# Altium PCB triumvi_integrated_small.PcbDoc
Units mil, origin at the board's own origin, x right, y up, seen from the top; angles counter-clockwise.
Board outline 2450 x 750 mil, 2 copper layers (Top Layer, Bottom Layer); 155 components, 126 nets, 572 pads, 20 vias.
Unrouted connection lines stored in the file: 393.
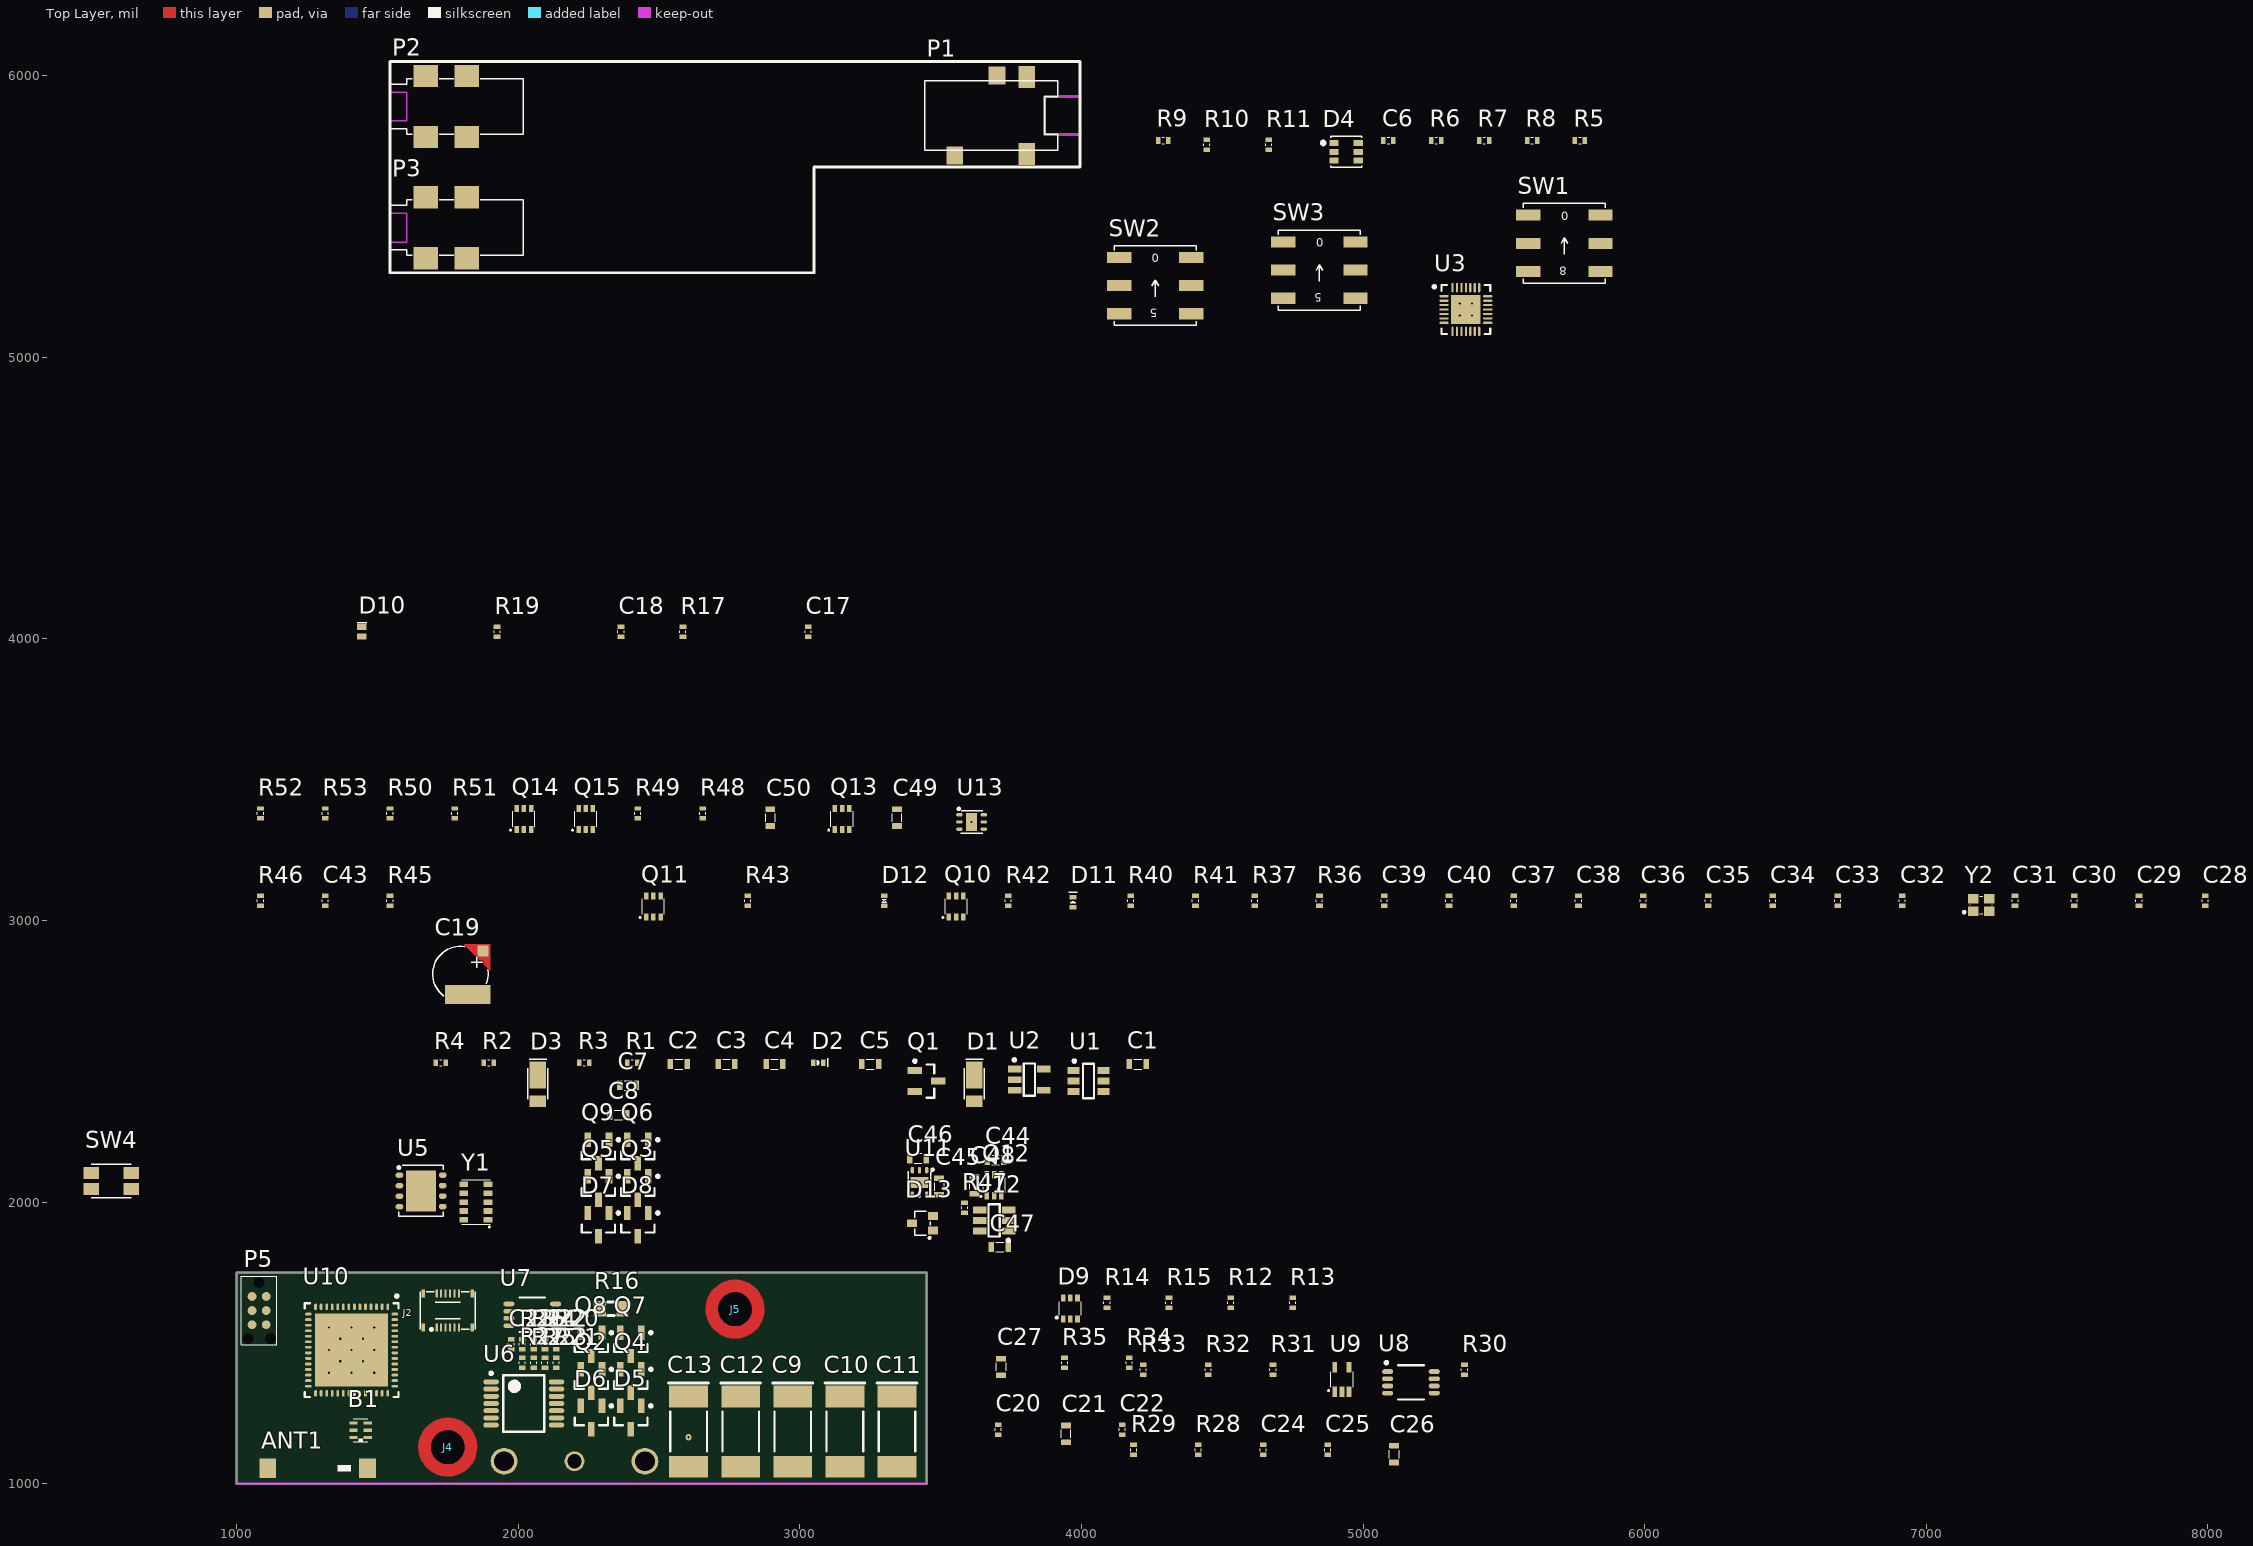
[diagram p0: Top Layer view]
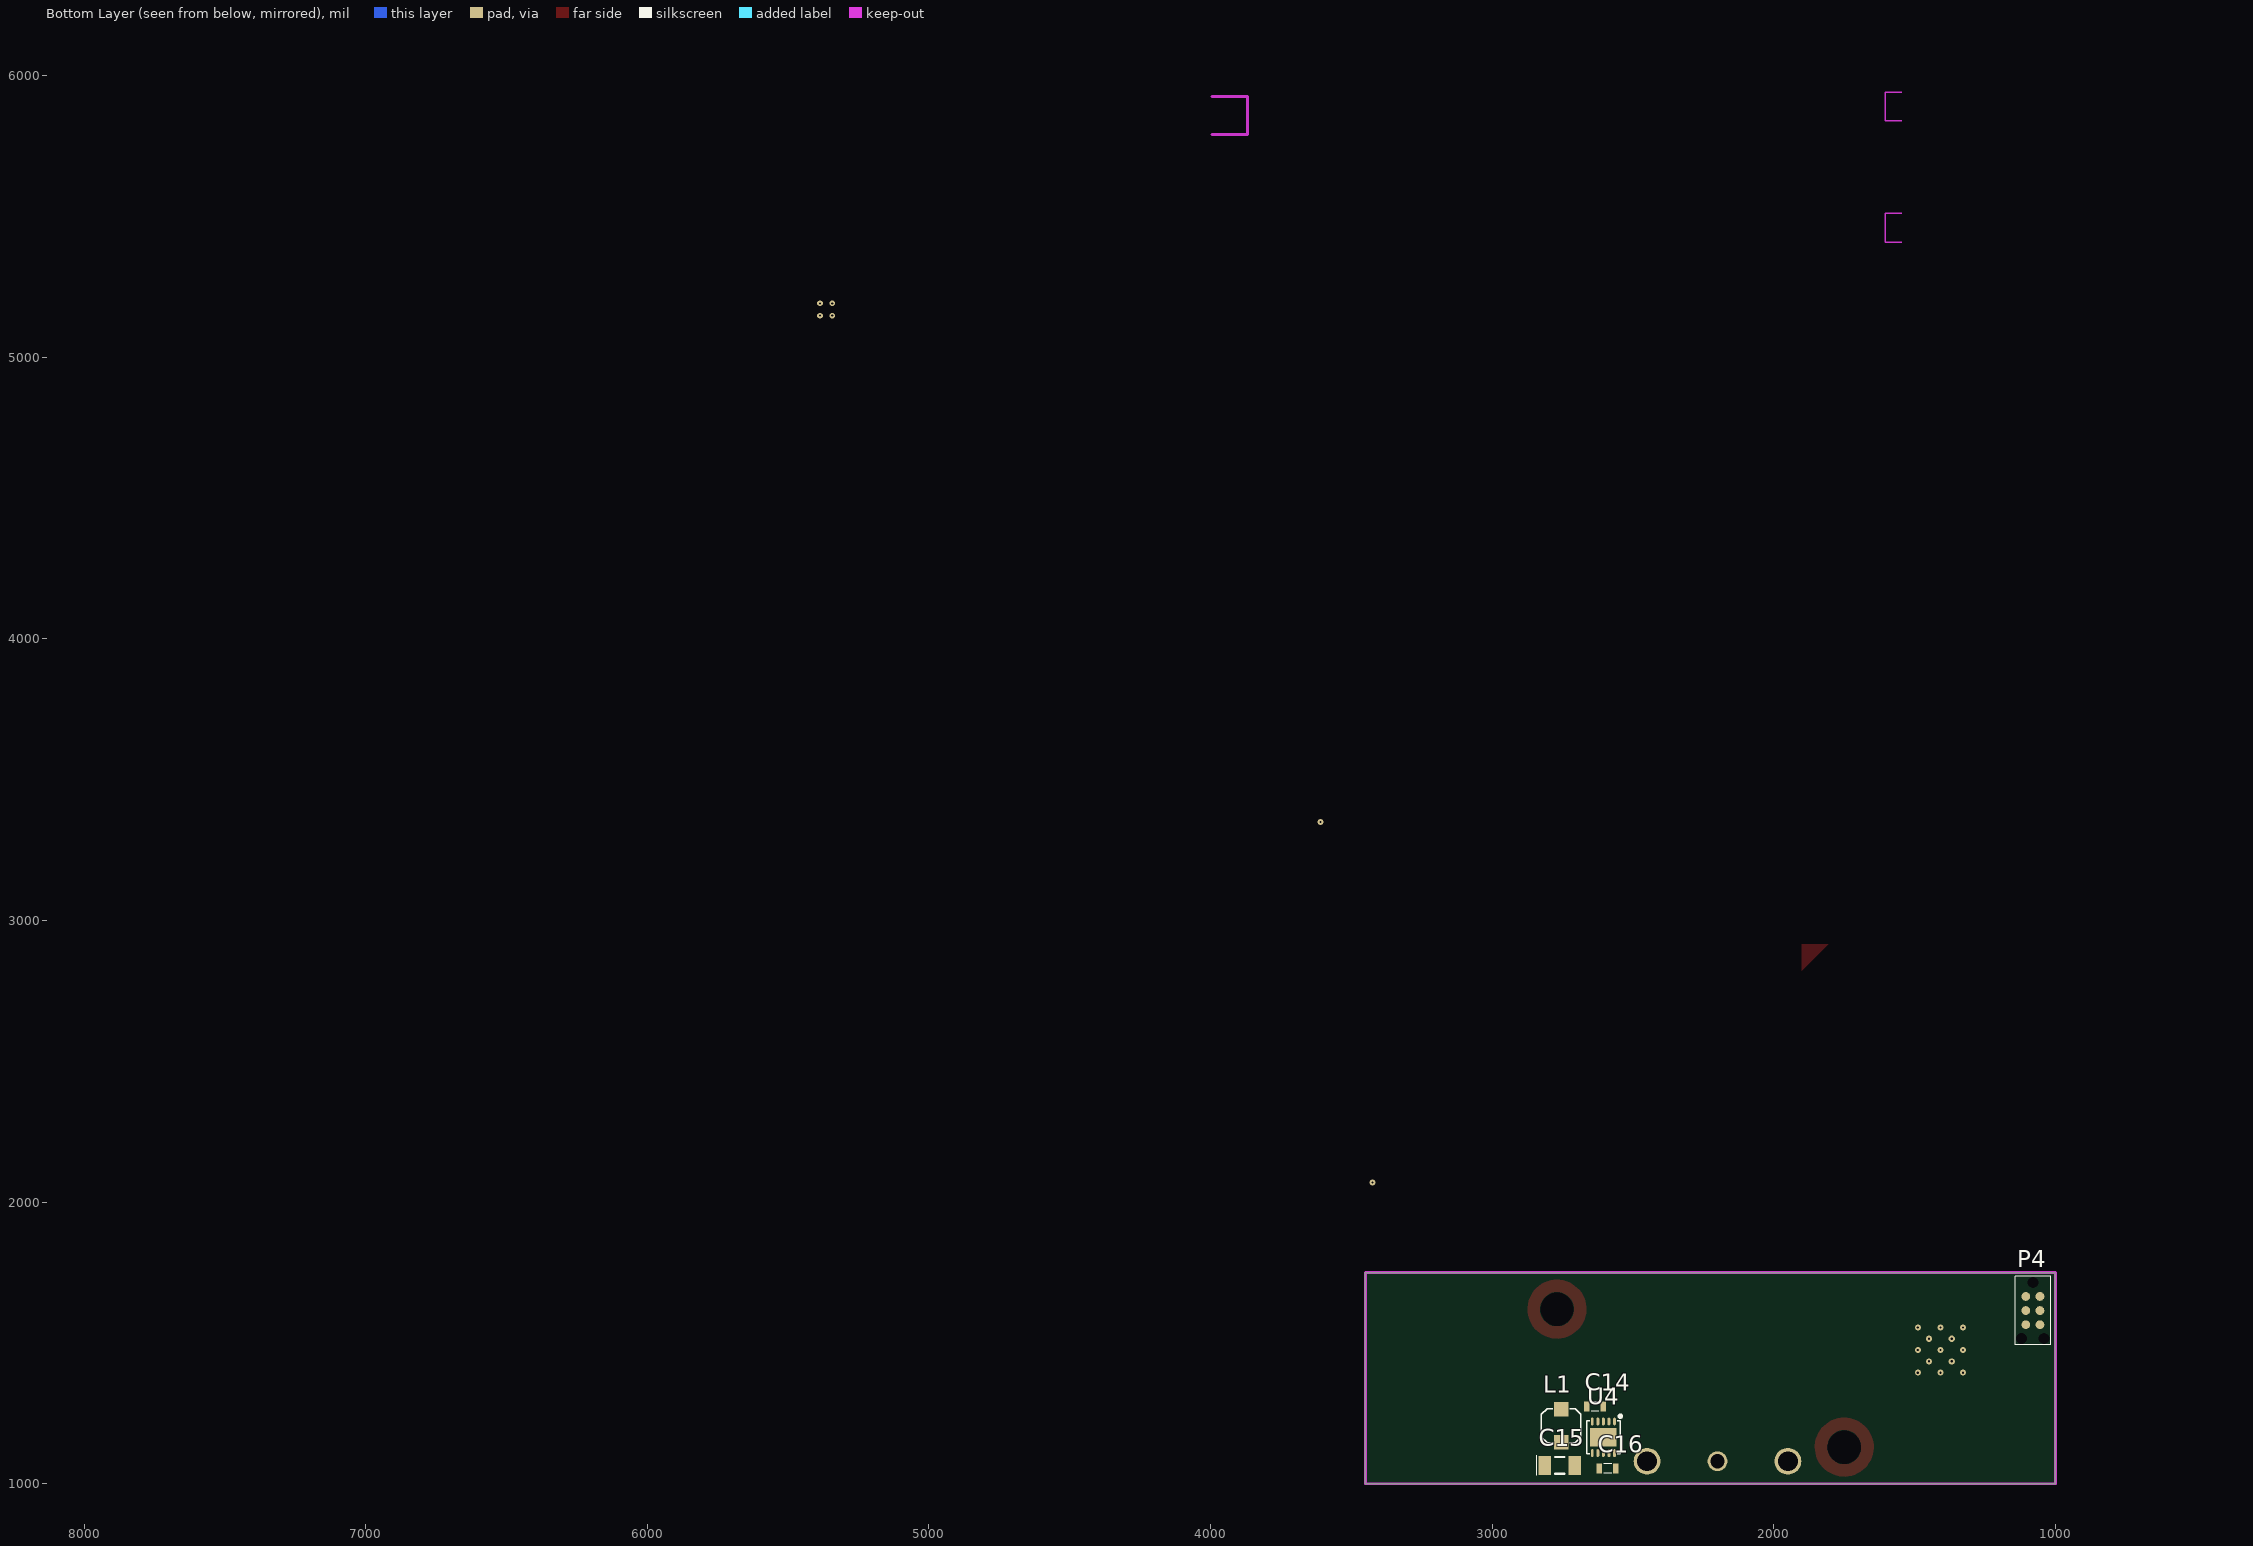
[diagram p1: Bottom Layer view, seen from below]

## Layer stack, top to bottom
Top Solder: solder mask 0.4, Solder Resist, Dk 3.5
Top Layer: signal copper 1.4
Dielectric 1: dielectric 12.6, FR-4, Dk 4.8
Bottom Layer: signal copper 1.4
Bottom Solder: solder mask 0.4, Solder Resist, Dk 3.5

## Board outline
1000,1000 3450,1000 3450,1750 1000,1750

## Design rules (kind name [scope] priority, off if disabled: settings)
Clearance "non plated holes" [InPadClass('NPHOLES')] p1: gap=10 // Sunstone Circuits Minimum Clearance Rule (MLB~4&6 Layer Designs)
Clearance "Clearance~Sunstone Circuits" [All] p2: gap=6 except(8: Poly-Poly) // Sunstone Circuits Minimum Clearance Rule (MLB~4&6 Layer Designs)
DiffPairsRouting [All] p1: maxlimit=10 minlimit=10 mostfreqgap=10 toplayer_minwidth=6 toplayer_maxwidth=15 toplayer_prefwidth=15 bottomlayer_minwidth=6 bottomlayer_maxwidth=15 bottomlayer_prefwidth=15 maxuncoupledlength=500
HoleSize "HoleSize~Sunstone Circuits" [All] p1: absolutevalues=TRUE maxlimit=251 minlimit=8 maxpercent=80.000 minpercent=20.000 // Sunstone Circuits Hole Size Rule (MLB~4&6 Layer Designs)
HoleSize Testpoint [All] p2: absolutevalues=TRUE maxlimit=100 minlimit=1 maxpercent=80.000 minpercent=20.000
HoleSize TestPointUsage [All] p3: absolutevalues=TRUE maxlimit=100 minlimit=1 maxpercent=80.000 minpercent=20.000
MinimumAnnularRing "MinimumAnnularRing~Sunstone Circuits" [All] p1 off: minimumring=7 // Sunstone Circuits Minimum Annular Ring (MLB~4&6 Layer Designs)
MinimumSolderMaskSliver [All] p1 off: minsoldermaskwidth=10
PlaneClearance "PlaneClearance~Sunstone Circuits" [All] p1: clearance=12 // Sunstone Circuits Power Plane Clearance Rule (MLB~4&6 Layer Designs)
PlaneConnect "PlaneConnect~Sunstone Circuits" [All] p1: planeconnectstyle=Relief reliefexpansion=10 reliefentries=4 reliefconductorwidth=8 reliefairgap=10 // Sunstone Circuits Power Plane Connect Rule (MLB~4&6 Layer Designs)
PolygonConnect "PolygonConnect~Sunstone Circuits" [All] p1: connectstyle=Relief reliefconductorwidth=8 reliefentries=4 polygonreliefangle="90 Angle" airgapwidth=10 // Sunstone Circuits Polygon Connect Style (MLB~4&6 Layer Designs)
RoomDefinition U_programming_header [InComponentClass('U_programming_header')] p1 off: confinementstyle=ConfineIn formatcopy=TRUE lockcomponents=FALSE outline 0,0 2000,0 2000,1000 0,1000
RoomDefinition U_power_generation [InComponentClass('U_power_generation')] p2 off: confinementstyle=ConfineIn formatcopy=TRUE lockcomponents=FALSE outline 0,0 2000,0 2000,1000 0,1000
RoomDefinition U_fram_rtc [InComponentClass('U_fram_rtc')] p3 off: confinementstyle=ConfineIn formatcopy=TRUE lockcomponents=FALSE outline 0,0 2000,0 2000,1000 0,1000
RoomDefinition U_energy_harvesting [InComponentClass('U_energy_harvesting')] p4 off: confinementstyle=ConfineIn formatcopy=TRUE lockcomponents=FALSE outline 0,0 2000,0 2000,1000 0,1000
RoomDefinition U_CT_switch [InComponentClass('U_CT_switch')] p5 off: confinementstyle=ConfineIn formatcopy=TRUE lockcomponents=FALSE outline 0,0 2000,0 2000,1000 0,1000
RoomDefinition U_config [InComponentClass('U_config')] p6 off: confinementstyle=ConfineIn formatcopy=TRUE lockcomponents=FALSE outline 0,0 2000,0 2000,1000 0,1000
RoomDefinition U_charging [InComponentClass('U_charging')] p7 off: confinementstyle=ConfineIn formatcopy=TRUE lockcomponents=FALSE outline 0,0 2000,0 2000,1000 0,1000
RoutingVias "RoutingVias~Sunstone Circuits" [All] p1: holewidth=16 width=30 viastyle="Through Hole" minholewidth=6 minwidth=20 maxholewidth=20 maxwidth=40 // Sunstone Circuits Routing Vias Rule (MLB~4&6 Layer Designs)
ShortCircuit "ShortCircuit~Sunstone Circuits" [All] p1: allowed=FALSE // Sunstone Circuits Short Circuit Rule~Do Not Allow (MLB~4&6 Layer Designs)
SilkToSilkClearance [All] p1 off: silktosilkclearance=10
SilkToSolderMaskClearance [IsPad] p1 off: minsilkscreentomaskgap=10 clearancetoexposedcopper=TRUE
SolderMaskExpansion TentVias [isVia] p1: expansion=-20 // Sunstone Circuits Solder Mask Expansion Rule (MLB~4&6 Layer Designs)
SolderMaskExpansion "SolderMaskExpansion~Sunstone Circuits" [All] p2: expansion=3 // Sunstone Circuits Solder Mask Expansion Rule (MLB~4&6 Layer Designs)
ViasUnderSMD "ViasUnderSMD~Sunstone Circuits" [All] p1: allowed=FALSE // Sunstone Circuits Vias Under SMD~Do Not Allow (MLB~4&6 Layer Designs)
Width "Width~Sunstone Circuits" [All] p1: maxlimit=100 minlimit=6 preferedwidth=10 // Sunstone Circuits Minimum Width Rule (MLB~4&6 Layer Designs)
22 further rules are at their usual default settings.

## Classes and differential pairs
component class U_charging: C1 C2 C3 C4 C5 D1 D2 D3 Q1 R1 R2 R3 R4 U1 U2
component class U_config: C6 D4 P1 P2 P3 R5 R6 R7 R8 R9 R10 R11 SW1 SW2 SW3 U3
component class U_CT_switch: C7 C8 D5 D6 D7 D8 D9 Q2 Q3 Q4 Q5 Q6 Q7 Q8 Q9 R12 R13 R14 R15 R16
component class U_energy_harvesting: C9 C10 C11 C12 C13 C14 C15 C16 L1 U4
component class U_fram_rtc: C17 C18 C19 D10 R17 R19 U5 Y1
component class U_IV_sensing: C20 C21 C22 C23 C24 C25 C26 C27 R20 R21 R22 R23 R24 R25 R26 R27 R28 R29 R30 R31 R32 R33 R34 R35 U6 U7 U8 U9
component class U_mcu: ANT1 B1 C28 C29 C30 C31 C32 C33 C34 C35 C36 C37 C38 C39 C40 C43 D11 D12 Q10 Q11 R36 R37 R40 R41 R42 R43 R45 R46 SW4 U10 Y2
component class U_power_generation: C44 C45 C46 C47 C48 C49 C50 D13 Q12 Q13 Q14 Q15 R47 R48 R49 R50 R51 R52 R53 U11 U12 U13
component class U_programming_header: P4 P5
differential pair CC2538_RF: +CC2538_RF_P -CC2538_RF_N

## Components (designator, comment, footprint, x,y, rotation, side; value= is the part's Value field where it differs from the comment)
ANT1 "2450AT45A100" 2450AT45A100 1287.83,1055 r180 top
B1 "2450BM15A0002E" 2450BM15A0002 1440.59,1190 r180 top
C1 "1u" 0603 4200,2490 r0 top
C2 "1u" 0603 2570,2490 r0 top
C3 "1u" 0603 2740,2490 r0 top
C4 "4.7u" 0603 2910,2490 r0 top
C5 "4.7u" 0603 3250,2490 r0 top
C6 "0.1u" 0402 5090,5769.37 r0 top
C7 "0.068u" 0603 2390,2415 r0 top
C8 "10000p" 0603 2355,2310 r0 top
C9 "220u" 2917 2975,1185 r270 top
C10 "220u" 2917 3160,1185 r270 top
C11 "220u" 2917 3345,1185 r270 top
C12 "220u" 2917 2790,1185 r270 top
C13 "220u" 2917 2605,1185 r270 top
C14 "1u" 0603 2635,1275 r180 bottom
C15 "100u" "1206 - POLAR MARKING" 2760,1065 r180 bottom
C16 "4.7u" 0603 2590,1055 r180 bottom
C17 "0.1u" 0402 3030,4025 r90 top
C18 "0.1u" 0402 2365,4025 r90 top
C19 "80m" XH414HG-IV01E 1795,2810 r0 top
C20 "0.1u" 0402 3705,1192.28 r90 top
C21 "10u" 0603 3945,1177.28 r90 top
C22 "0.1u" 0402 4145,1192.28 r90 top
C23 "18p" 0402 1975,1495 r270 top
C24 "0.1u" 0402 4645,1120 r90 top
C25 "0.1u" 0402 4875,1120 r90 top
C26 "10u" 0603 5110,1105 r90 top
C27 "10u" 0603 3715,1415 r90 top
C28 "0.1u" 0402 7990,3070 r90 top
C29 "0.1u" 0402 7755,3070 r90 top
C30 "0.1u" 0402 7525,3070 r90 top
C31 "0.1u" 0402 7315,3070 r90 top
C32 "0.1u" 0402 6915,3070 r90 top
C33 "0.1u" 0402 6685,3070 r90 top
C34 "0.1u" 0402 6455,3070 r90 top
C35 "220p" 0402 6225,3070 r90 top
C36 "0.1u" 0402 5995,3070 r90 top
C37 "12p" 0402 5535,3070 r90 top
C38 "12p" 0402 5765,3070 r90 top
C39 "0.1u" 0402 5075,3070 r90 top
C40 "0.1u" 0402 5305,3070 r90 top
C43 "1000p" 0402 1315,3070 r90 top
C44 "4.7u" 0603 3695,2150 r0 top
C45 "4.7u" 0603 3495,2055 r90 top
C46 "4.7u" 0603 3420,2155 r180 top
C47 "4.7u" 0603 3710,1840 r180 top
C48 "10u" 0603 3620,2060 r90 top
C49 "4.7u" 0603 3345,3365 r90 top
C50 "4.7u" 0603 2895,3365 r90 top
D1 "DFLS130L" PowerDI123 3620,2420 r90 top
D2 "APG1005CGC-T" "0402 - LED" 3065,2495 r0 top
D3 "DFLS130L" PowerDI123 2070,2420 r90 top
D4 "CLY6D-FKC" PLCC6 4940,5729.37 r0 top
D5 "D_BAS40-04" SOT23-3 2400,1235 r270 top
D6 "D_BAS40-04" SOT23-3 2260,1235 r270 top
D7 "D_BAS40-04" SOT23-3 2285,1920 r270 top
D8 "D_BAS40-04" SOT23-3 2425,1920 r270 top
D9 "BAS40TW" SOT-363 3960.59,1622.4 r0 top
D10 "CZRER52C3V6" 0503/SOD-723F 1445,4025 r90 top
D11 "LED, Red" "0402 - LED" 3970,3065 r90 top
D12 "CDBQR0130L" "0402 - DIODE" 3300,3070 r90 top
D13 "BAV70W-7-F" SOT323 3435,1925 r90 top
J2 "DF40B(2.0)-12DS-0.4V" DF40B(2.0)-12DS-0.4V 1750,1615 r0 top
J4 "9774020243R" 9774020243R 1750,1130 r0 top
J5 "9774020243R" 9774020243R 2770,1620 r0 top (schematic designator J4)
L1 "10u" CDRH2D18 2755,1205.94 r90 bottom
P1 "PJ3516S-041" PJ3516S-041 3916.54,5858.27 r180 top
P2 "PJ2505S-041" PJ2505S-041 1605,5890 r0 top
P3 "PJ2505S-041" PJ2505S-041 1605,5460 r0 top
P4 "TC2030" TC2030-IDC-NLFP 1080,1615 r270 bottom
P5 "TC2030" TC2030-IDC-NLFP 1080,1615 r270 top
Q1 "Si2369DS" SOT23-3 3450,2430 r0 top
Q2 "Si2367DS" SOT23-3 2260,1365 r270 top
Q3 "Si2342DS" SOT23-3 2425,2050 r270 top
Q4 "Si2367DS" SOT23-3 2400,1365 r270 top
Q5 "Si2342DS" SOT23-3 2285,2050 r270 top
Q6 "Si2338DS" SOT23-3 2425,2180 r270 top
Q7 "Si2338DS" SOT23-3 2400,1495 r270 top
Q8 "Si2338DS" SOT23-3 2260,1495 r270 top
Q9 "Si2338DS" SOT23-3 2285,2180 r270 top
Q10 "DMN2004DWK" SC70-6 3555,3050 r0 top
Q11 "DMN2004DWK" SC70-6 2480,3050 r0 top
Q12 "Si1965DH" SC70-6 3690,2060 r0 top
Q13 "Si1865DDL" SC70-6 3150,3360 r0 top
Q14 "Si1865DDL" SC70-6 2020,3360 r0 top
Q15 "Si1865DDL" SC70-6 2240,3360 r0 top
R1 "910" 0402 2405,2495 r0 top
R2 "47k" 0402 1895,2495 r0 top
R3 "47k" 0402 2235,2495 r0 top
R4 "1Meg" 0402 1725,2495 r0 top
R5 "100k" 0402 5770,5769.37 r0 top
R6 "110" 0402 5260,5769.37 r0 top
R7 "220" 0402 5430,5769.37 r0 top
R8 "324" 0402 5600,5769.37 r0 top
R9 "10k" 0402 4290,5769.37 r0 top
R10 "10k" 0402 4445,5754.37 r90 top
R11 "100k" 0402 4665,5754.37 r90 top
R12 "47k" 0402 4530.59,1642.4 r90 top
R13 "47k" 0402 4750.59,1642.4 r90 top
R14 "1Meg" 0402 4090.59,1642.4 r90 top
R15 "1Meg" 0402 4310.59,1642.4 r90 top
R16 "20" 0805 2330,1621.34 r180 top
R17 "10k" 0402 2585,4025 r90 top
R19 "10k" 0402 1925,4025 r90 top
R20 "910" 0402 2135,1495 r270 top
R21 "48.7k" 0402 2135,1430 r270 top
R22 "324" 0402 2095,1495 r270 top
R23 "24.3k" 0402 2095,1430 r270 top
R24 "20" 0402 2055,1495 r270 top
R25 "12.1k" 0402 2055,1430 r270 top
R26 "110" 0402 2015,1495 r270 top
R27 "5.76k" 0402 2015,1430 r270 top
R28 "100k" 0402 4415,1120 r90 top
R29 "2Meg" 0402 4185,1120 r90 top
R30 "1Meg" 0402 5360,1405 r90 top
R31 "100k" 0402 4680,1405 r90 top
R32 "1Meg" 0402 4450,1405 r90 top
R33 "100k" 0402 4220,1405 r90 top
R34 "47k" 0402 4170,1430 r90 top
R35 "100" 0402 3940,1430 r90 top
R36 "47k" 0402 4845,3070 r90 top
R37 "1Meg" 0402 4615,3070 r90 top
R40 "1Meg" 0402 4175,3070 r90 top
R41 "2.2k" 0402 4405,3070 r90 top
R42 "1Meg" 0402 3740,3070 r90 top
R43 "1Meg" 0402 2815,3070 r90 top
R45 "2.2k" 0402 1545,3070 r90 top
R46 "56k" 0402 1085,3070 r90 top
R47 "470k" 0402 3585,1980 r270 top
R48 "1Meg" 0402 2655,3380 r90 top
R49 "1Meg" 0402 2425,3380 r90 top
R50 "1Meg" 0402 1545,3380 r90 top
R51 "1Meg" 0402 1775,3380 r90 top
R52 "1Meg" 0402 1085,3380 r90 top
R53 "1Meg" 0402 1315,3380 r90 top
SW1 "SH-7050TA" SH-7050A 5715,5404.37 r0 top
SW2 "SH-7010TA" SH-7010A 4262.05,5254.37 r0 top
SW3 "SH-7010TA" SH-7010A 4845,5309.37 r0 top
SW4 "EVQP7C" EVQP7C 555,2075 r180 top
U1 "LTC3200-5" SOT23-6 4025,2430 r0 top
U2 "MCP73831" TSOT23-5 3815,2435 r0 top
U3 "SX1509B" QFN40P400X400X60_HS-29N 5365,5169.37 r0 top
U4 "LTC3588EDD-1#PBF" QFN-10 2605,1165 r270 bottom
U5 "FM25V02A-DGTR" TDFN-8 1655,2040 r0 top
U6 "ADG604" TSSOP-14 2020,1285 r0 top
U7 "INA333" MSOP-8 2050,1600 r180 top
U8 "MCP6032" MSOP-8 5170,1360 r0 top
U9 "TS881" SC70-5 4925,1370 r0 top
U10 "CC2538" QFN56 1408.54,1474.53 r270 top
U11 "ADP151_LFCSP" CP-6-3 3425,2070 r270 top
U12 "LTC4412" TSOT-23 3690,1935 r180 top
U13 "ADP151_LFCSP" CP-6-3 3610,3350 r0 top
Y1 "RV-3049-C3" RV-3049-C3 1850,2000 r90 top
Y2 "FA-128" FA-128 7195,3055 r0 top

## Footprints (in the part's own frame and the unit in brackets; to place one, negate y for a bottom-side part, rotate by r counter-clockwise, add the part's x,y. Pads: shape width x height; smd on the part's side, far side on the other; paste and mask are expansions set on the pad)
0402 [mm] "2-Leads, Body 1.00x0.50mm, IPC Medium Density"
  rect 0.4x0.6 smd: 1(-0.45,0) 2(0.45,0)
  silkscreen extent -0.1,-0.28 0.1,0.28, body extent -0.53,-0.28 0.53,0.27, height 0.4
"0402 - DIODE" [mm] "2-Leads, Body 1.00x0.50mm, IPC Medium Density"
  rect 0.4x0.6 smd: 1(-0.45,0) 2(0.45,0)
  silkscreen extent -0.13,-0.18 0.13,0.18, body extent -0.53,-0.28 0.53,0.27, height 0.4
"0402 - LED" [mm] "2-Leads, Body 1.00x0.50mm, IPC Medium Density"
  rect 0.4x0.6 smd: 1(-0.45,0) 2(0.45,0)
  silkscreen extent -0.13,-0.38 0.89,0.38, body extent -0.53,-0.28 0.53,0.27, height 0.4
0503/SOD-723F [mm]
  rect 0.55x0.85 smd: 1(-0.425,0) 2(0.425,0)
  silkscreen extent 0.8,-0.43 0.8,0.43, body extent -0.58,-0.33 0.58,0.33, height 0.6
0603 [mm] "2-Leads, Body 1.55x0.85mm, IPC Medium Density"
  rect 0.5x0.9 smd: 1(-0.75,0) 2(0.75,0)
  silkscreen extent -0.35,-0.45 0.35,0.43, body extent -0.75,-0.42 0.75,0.43, height 0.5
0805 [mm] "Chip Resistor, Body 2.0x1.2mm, IPC Low Density"
  rect 1.1x1.4 smd: 1(-1.025,0) 2(1.025,0)
  silkscreen extent -0.3,-0.6 0.3,0.6, body extent -1.1,-0.67 1.1,0.67, height 0.7
"1206 - POLAR MARKING" [mm]
  rect 1.1x1.7 smd: 1(-1.35,0) 2(1.35,0)
  silkscreen extent -2.07,-0.9 0.4,0.91, body extent -1.58,-0.83 1.58,0.82, height 1.59
2450AT45A100 [mm] "Johnson Technology 2.4 GHz chip antenna"
  rect 1.5x1.8 smd: 1(-4.5,0) ""(4.5,0)
  silkscreen extent -3,-0.3 -1.8,0.3, body extent -4.8,-1 4.8,1, height 1.2
2450BM15A0002 [mm] "Chip Array, Flat, 6-Leads, Pitch 0.65mm,  Body 2.00x1.25mm,  IPC Medium Density"
  rect 0.75x0.3 smd: 1(-0.65,0.65) 2(-0.65,0) 3(-0.65,-0.65) 4(0.65,-0.65) 5(0.65,0) 6(0.65,0.65)
  silkscreen extent -0.65,-1.05 0.65,1.05, body extent -0.67,-1.05 0.67,1.05, height 0.81
2917 [mm] "Chip Capacitor, 2-Leads, Body 7.30x3.20mm, IPC Medium Density"
  rect 1.95x3.5 smd: 1(-3.175,0) 2(3.175,0)
  silkscreen extent -4.4,-1.8 1.8,1.8, body extent -3.65,-2.15 3.65,2.15, height 4.31
9774020243R [mm] "m2 standoff, 2mm stack height"
  round 0 hole 3 unplated: ""(0,0)
  Top Layer region: 2.65,0 2.302,-1.312 1.35,-2.28 0.044,-2.65 -1.274,-2.324 -2.257,-1.388 -2.649,-0.088 -2.345,1.235 -1.426,2.234 -0.132,2.647 1.196,2.365 2.21,1.462 2.644,0.176 2.644,0.176 2.625,0.175 1.55,0.175 1.54,0.177 1.254,0.911 0.644,1.41 -0.133,1.544 -0.875,1.279 -1.391,0.684 -1.547,-0.089 -1.304,-0.838 -0.723,-1.371 0.044,-1.549 0.8,-1.327 1.35,-0.762 1.55,0 1.55,0
  Top Layer region: 1.55,0 2.65,0 2.649,0.088 2.644,0.176 2.644,0.176 2.625,0.175 1.55,0.175 1.54,0.177 1.547,0.088 1.55,0
  body extent -2.17,-2.17 2.18,2.17, height 2
CDRH2D18 [mm] "Sumdia SMD power inductor"
  rect 1.3x1.3 smd: 1(-1.5,0) 2(1.5,0)
  silkscreen extent -1.52,-1.78 1.52,1.78, body extent -1.5,-1.7 1.5,1.8, height 2
CP-6-3 [mm] "QFN, 6-Leads, Body 2.00x2.00mm, Pitch 0.65mm, Thermal Pad 1.00x1.55mm, IPC Medium Density"
  oval 0.6x0.3 smd: 1(-1.1,0.65) 2(-1.1,0) 3(-1.1,-0.65) 4(1.1,-0.65) 5(1.1,0) 6(1.1,0.65)
  rect 1x1.6 smd: 7(0,0)
  silkscreen extent -1.25,-1 1,1.27, body extent -1,-1 1,1, height 0.6
DF40B(2.0)-12DS-0.4V [mm] "Hirose DF40 Series, 0.4 mm pitch, 2.0 mm stack height, 12 positions"
  rect 0.2x0.7 smd: 1(-1,-1.54) 2(-0.6,-1.54) 3(-0.2,-1.54) 4(0.2,-1.54) 5(0.6,-1.54) 6(1,-1.54) 7(1,1.54) 8(0.6,1.54) 9(0.2,1.54) 10(-0.2,1.54) 11(-0.6,1.54) 12(-1,1.54)
  rect 0.3x0.7 smd: ""(-2.2,-1.54) ""(-2.2,1.54) ""(2.2,-1.54) ""(2.2,1.54)
  silkscreen extent -2.5,-1.8 2.5,1.7, body extent -2.5,-1.69 2.5,1.69, height 1.9
EVQP7C [mm] "Panasonic EVQP7 tactile button"
  rect 1.4x1.05 smd: 1(-1.8,0.725) 1(1.8,0.725) 2(-1.8,-0.725) 2(1.8,-0.725)
  round 0 hole 0.7 unplated: ""(0,0.9) ""(0,-0.9)
  silkscreen extent -1.8,-1.5 1.8,1.5, body extent -1.8,-2.2 1.8,1.5, height 1.35
FA-128 [mm] "Seiko Epson FA-128 Crystal"
  rect 0.95x0.85 smd: 1(-0.725,-0.575) 2(0.725,-0.575) 3(0.725,0.575) 4(-0.725,0.575)
  silkscreen extent -1.63,-0.8 1,0.8, body extent -1,-0.8 1,0.8, height 0.5
MSOP-8 [mm] "TSOP, 8-Leads, Body 3.00x3.00mm, Pitch 0.65mm, Thermal Pad 1.80x1.50mm, IPC Medium Density"
  oval 1x0.42 smd: 1(-2.1,0.975) 2(-2.1,0.325) 3(-2.1,-0.325) 4(-2.1,-0.975) 5(2.1,-0.975) 6(2.1,-0.325) 7(2.1,0.325) 8(2.1,0.975)
  silkscreen extent -2.35,-1.55 1.15,1.9, body extent -1.55,-1.55 1.55,1.55, height 1.1
PJ2505S-041 [mm] "2.5 mm phone jack, 4 terminals"
  rect 2.2x2 smd: 1(1.7,2.75) 2(1.7,-2.75) 3(5.4,2.75) 4(5.4,-2.75)
  round 0 hole 1.5 unplated: ""(2.8,0) ""(7.8,0)
  Keep-Out Layer lines w0.127: -1.524,-1.3 0,-1.3 0,1.3 -1.524,1.3
  silkscreen extent -1.5,-2.5 10.5,2.5, body extent -1.5,-3.1 10.5,2.9, height 3.7
PJ3516S-041 [mm] "Switchtech Enterprise LTD. 3.5mm phone jack"
  rect 1.5x2 smd: 1(2.8,-3.465) 2(2.8,3.465)
  rect 1.5x1.6 smd: 3(5.5,-3.6) 4(9.3,3.6)
  rect 0x0 hole 1.3 unplated: ""(10.55,0)
  Keep-Out Layer lines w0.254: -2,1.7 1.2,1.7 1.2,-1.7 -2,-1.7
  silkscreen extent 0,-3.15 12,3.15, body extent -2,-3.15 12,3.15, height 4.5
PLCC6 [mm] "CREE PLCC6 LED"
  rect 0.85x0.55 smd: 1(-1.1,0.8) 2(-1.1,0) 3(-1.1,-0.8) 4(1.1,-0.8) 5(1.1,0) 6(1.1,0.8)
  silkscreen extent -2.22,-1.4 1.4,1.4, body extent -1.7,-1.4 1.7,1.4, height 1.85
PowerDI123 [mm] "Diodes PowerDI123 pacakge"
  rect 1.05x1.5 smd: 1(-1.575,0)
  rect 2.4x1.5 smd: 2(0.8,0)
  silkscreen extent -1.4,-0.9 2.22,0.9, body extent -1.85,-0.9 1.85,0.9, height 1
QFN40P400X400X60_HS-29N [mm] "QFN, 28-Leads, Body 4.00x4.00mm, Pitch 0.40mm, Thermal Pad 2.65x2.65mm, IPC Medium Density"
  oval 0.85x0.2 smd: 1(-1.975,1.2) 2(-1.975,0.8) 3(-1.975,0.4) 4(-1.975,0) 5(-1.975,-0.4) 6(-1.975,-0.8) 7(-1.975,-1.2) 15(1.975,-1.2) 16(1.975,-0.8) 17(1.975,-0.4) 18(1.975,0) 19(1.975,0.4) 20(1.975,0.8) 21(1.975,1.2)
  oval 0.2x0.85 smd: 8(-1.2,-1.975) 9(-0.8,-1.975) 10(-0.4,-1.975) 11(0,-1.975) 12(0.4,-1.975) 13(0.8,-1.975) 14(1.2,-1.975) 22(1.2,1.975) 23(0.8,1.975) 24(0.4,1.975) 25(0,1.975) 26(-0.4,1.975) 27(-0.8,1.975) 28(-1.2,1.975)
  rect 2.65x2.65 smd: 29(0,0)
  silkscreen extent -2.97,-2.2 2.2,2.2, body extent -2.05,-2.05 2.05,2.05, height 0.6
QFN56 [mm] "QFN, 56-Leads, Body 8.00x8.00mm, Pitch 0.50mm, Thermal Pad 6.60x6.60mm, IPC Medium Density"
  oval 0.6x0.25 smd: 1(-3.9,3.25) 2(-3.9,2.75) 3(-3.9,2.25) 4(-3.9,1.75) 5(-3.9,1.25) 6(-3.9,0.75) 7(-3.9,0.25) 8(-3.9,-0.25) 9(-3.9,-0.75) 10(-3.9,-1.25) 11(-3.9,-1.75) 12(-3.9,-2.25) 13(-3.9,-2.75) 14(-3.9,-3.25) 29(3.9,-3.25) 30(3.9,-2.75) 31(3.9,-2.25) 32(3.9,-1.75) 33(3.9,-1.25) 34(3.9,-0.75) 35(3.9,-0.25) 36(3.9,0.25) 37(3.9,0.75) 38(3.9,1.25) 39(3.9,1.75) 40(3.9,2.25) 41(3.9,2.75) 42(3.9,3.25)
  oval 0.25x0.6 smd: 15(-3.25,-3.9) 16(-2.75,-3.9) 17(-2.25,-3.9) 18(-1.75,-3.9) 19(-1.25,-3.9) 20(-0.75,-3.9) 21(-0.25,-3.9) 22(0.25,-3.9) 23(0.75,-3.9) 24(1.25,-3.9) 25(1.75,-3.9) 26(2.25,-3.9) 27(2.75,-3.9) 28(3.25,-3.9) 43(3.25,3.9) 44(2.75,3.9) 45(2.25,3.9) 46(1.75,3.9) 47(1.25,3.9) 48(0.75,3.9) 49(0.25,3.9) 50(-0.25,3.9) 51(-0.75,3.9) 52(-1.25,3.9) 53(-1.75,3.9) 54(-2.25,3.9) 55(-2.75,3.9) 56(-3.25,3.9)
  rect 6.6x6.6 smd: 57(0,0)
  silkscreen extent -5,-4.22 4.22,4.23, body extent -4.08,-4.07 4.07,4.08, height 1
QFN-10 [mm] "QFN, 10-Leads, Body 4.00x4.00mm, Pitch 0.50mm, Thermal Pad 1.65x2.38mm, IPC Medium Density"
  oval 0.7x0.25 smd: 1(-1.425,1) 2(-1.425,0.5) 3(-1.425,0) 4(-1.425,-0.5) 5(-1.425,-1) 6(1.425,-1) 7(1.425,-0.5) 8(1.425,0) 9(1.425,0.5) 10(1.425,1)
  rect 1.65x2.38 smd: 11(0,0)
  silkscreen extent -2.02,-1.5 1.5,1.65, body extent -1.5,-1.5 1.5,1.5, height 0.75
RV-3049-C3 [mm] "RV-3049-C3"
  rect 0.5x0.8 smd: 1(-1.6,-1.1) 2(-0.8,-1.1) 3(0,-1.1) 4(0.8,-1.1) 5(1.6,-1.1) 6(1.6,1.1) 7(0.8,1.1) 8(0,1.1) 9(-0.8,1.1) 10(-1.6,1.1)
  silkscreen extent -2.26,-1.3 2,1.3, body extent -1.9,-1.3 1.9,1.3, height 0.9
SC70-5 [mm]
  rect 0.45x0.95 smd: 1(-0.65,-1.1) 2(0,-1.1) 3(0.65,-1.1) 4(0.65,1.1) 5(-0.65,1.1)
  silkscreen extent -1.2,-1 1,0.7, body extent -1,-0.7 1,0.7, height 1.1
SC70-6 [mm]
  rect 0.406x0.648 smd: 1(-0.65,-0.95) 2(0,-0.95) 3(0.65,-0.95) 4(0.65,0.95) 5(0,0.95) 6(-0.65,0.95)
  silkscreen extent -1.2,-1 1,0.7, body extent -1,-0.7 1,0.7, height 1.1
SH-7010A [mm] "Rotary Coded Switch, SH-7000 series, 10 positions, real code, J hook"
  rect 2.2x1 smd: 1(-3.25,2.54) 2(3.25,-2.54) 4(-3.25,-2.54) 8(3.25,2.54) C(-3.25,0) C(3.25,0)
  silkscreen extent -3.7,-3.6 3.7,3.6, body extent -3.75,-3.65 3.75,3.65, height 3.77
SH-7050A [mm] "Rotary Coded Switch, SH-7000 series, 16 positions, real code, J hook"
  rect 2.2x1 smd: 1(-3.25,2.54) 2(3.25,-2.54) 4(-3.25,-2.54) 8(3.25,2.54) C(-3.25,0) C(3.25,0)
  silkscreen extent -3.7,-3.6 3.7,3.6, body extent -3.75,-3.65 3.75,3.65, height 3.77
SOT23-3 [mm] "SOT23, 3-Leads, Body 2.9x1.3mm, Pitch 0.95mm, Lead Span 2.3mm, IPC Medium Density"
  rect 1.3x0.6 smd: 1(-1.05,0.95) 2(-1.05,-0.95) 3(1.05,0)
  silkscreen extent -1.17,-1.5 0.7,1.93, body extent -0.7,-1.5 0.7,1.5, height 1.2
SOT23-6 [mm] "SOT23, 6-Leads, Body 2.90x2.45mm, Pitch 0.95mm, IPC Medium Density"
  rect 1.05x0.6 smd: 1(-1.35,0.95) 2(-1.35,0) 3(-1.35,-0.95) 4(1.35,-0.95) 5(1.35,0) 6(1.35,0.95)
  silkscreen extent -1.4,-1.55 0.5,1.92, body extent -0.88,-1.52 0.87,1.53, height 1.45
SOT323 [mm] "SOT323"
  rect 0.7x0.9 smd: 1(-0.65,-0.95) 2(0.65,-0.95) 3(0,0.95)
  silkscreen extent -1.38,-0.71 1.1,0.7, body extent -1.1,-0.7 1.1,0.7, height 1
SOT-363 [mm]
  rect 0.42x0.6 smd: 1(-0.65,-0.95) 2(0,-0.95) 3(0.65,-0.95) 4(0.65,0.95) 5(0,0.95) 6(-0.65,0.95)
  silkscreen extent -1.28,-0.88 1,0.6, body extent -1,-0.6 1,0.6, height 1
TC2030-IDC-NLFP [mil]
  round 31 smd paste-1181.1: 1(-50,-25) 2(-50,25) 3(0,-25) 4(0,25) 5(50,-25) 6(50,25)
  round 0 hole 39 unplated: ""(-100,0) ""(100,-40) ""(100,40)
  Top Layer pour cut-out: -50,25 -50,-25 50,-25 50,25
  silkscreen extent -122,-63 122,63
TDFN-8 [mm] "CYPRESS TDFN-8 (4 x 4.5 x 0.8 mm)"
  oval 0.7x0.5 smd: 1(-1.95,1.425) 2(-1.95,0.475) 3(-1.95,-0.475) 4(-1.95,-1.425) 5(1.95,-1.425) 6(1.95,-0.475) 7(1.95,0.475) 8(1.95,1.425)
  rect 2.7x3.7 smd: 9(0,0)
  silkscreen extent -2.1,-2.3 2,2.3, body extent -2,-2.3 2,2.3, height 0.8
TSOT23-5 [mm] "SOT23, 5-Leads, Body 2.90x2.80mm, Pitch 0.95mm, IPC Medium Density"
  rect 1.22x0.6 smd: 1(-1.31,0.95) 2(-1.31,0) 3(-1.31,-0.95) 4(1.31,-0.95) 5(1.31,0.95)
  silkscreen extent -1.47,-1.45 0.5,1.9, body extent -0.87,-1.45 0.87,1.45, height 1
TSOT-23 [mm] "SOT23, 6-Leads, Body 2.90x2.45mm, Pitch 0.95mm, IPC Medium Density"
  rect 1.22x0.62 smd: 1(-1.31,0.95) 2(-1.31,0) 3(-1.31,-0.95) 4(1.31,-0.95) 5(1.31,0) 6(1.31,0.95)
  silkscreen extent -1.4,-1.45 0.5,1.92, body extent -0.88,-1.45 0.87,1.45, height 1
TSSOP-14 [mm] "TSOP, 14-Leads, Body 5.00x4.40mm, Pitch 0.65mm, IPC Medium Density"
  oval 1.4x0.45 smd: 1(-2.95,1.95) 2(-2.95,1.3) 3(-2.95,0.65) 4(-2.95,0) 5(-2.95,-0.65) 6(-2.95,-1.3) 7(-2.95,-1.95) 8(2.95,-1.95) 9(2.95,-1.3) 10(2.95,-0.65) 11(2.95,0) 12(2.95,0.65) 13(2.95,1.3) 14(2.95,1.95)
  silkscreen extent -3.07,-2.55 1.85,2.85, body extent -3.19,-2.55 3.19,2.55, height 1.1
XH414HG-IV01E [mm] "Seiko instruments XH414HG-IV01E"
  rect 1x1 smd: 1(2.05,2.075)
  rect 4.1x1.7 smd: 2(0.65,-1.85)
  Top Layer region: 2.7,0.3 2.7,2.7 0.3,2.7
  silkscreen extent -2.5,-2.01 2.5,2.5, body extent -2.4,-2.4 2.4,2.4, height 1.85

## Part data
ANT1: "2.45 GHz High Gain SMD Chip Antenna"
B1: "2.45 GHz Balun for TI CC253X"
C1 C2 C3 C14: library part C1608X7R1C105K080AC, "1μF ±10% 16V Ceramic Capacitor X7R 0603"
C4 C5 C16 C44 C45 C46 C47 C49 C50: library part CGB3B1X5R1A475K055AC, "4.7μF ±10% 10V Ceramic Capacitor X5R 0603"
C6 C17 C18 C20 C22 C24 C25 C28 C29 C30 C31 C32 C33 C34 C36 C39 C40: library part GRM155R71C104KA88D, "0.10μF ±10% 16V Ceramic Capacitor X7R 0402"
C7: library part C0603C683K5RACTU, "0.068μF ±10% 50V Ceramic Capacitor X7R 0603"
C8: library part C0603C103J5RACTU, "10000pF ∮5% 50V Ceramic Capacitor X7R 0603"
C9 C10 C11 C12 C13: library part T495X227K016ATE100, "220μF ±10% Molded Tantalum Capacitors 16V"
C15: library part F930J107MAA, "100μF ±20% Molded Tantalum Capacitors 6.3V 1206"
C19: library part XH414HG-IV01E, "80mF (EDLC) Supercapacitor 3.3V Coin"
C21 C26 C27 C48: library part C1608X5R0J106M080AB, "10μF ±20% 6.3V Ceramic Capacitor X5R 0603"
C23: library part 500R07S180GV4T, "18pF ∮2% 50V Ceramic Capacitor C0G, NP0 0402"
C35: library part C0402C221K5RACTU, "220pF ∮10% 50V Ceramic Capacitor X7R 0402"
C37 C38: library part 500R07S120GV4T, "12pF ∮2% 50V Ceramic Capacitor C0G, NP0 0402"
C43: library part C1005C0G1H102J050BA, "1000pF ∮5% 50V Ceramic Capacitor C0G, NP0 0402"
D1 D3: "1.0A SURFACE MOUNT SCHOTTKY BARRIER RECTIFIER"
D2: "Green 571nm LED Indication - Discrete 2V 0402 (1005 Metric)"
D4: library part CLY6D-FKC-CK1N1D1BB7D3D3, "Red, Green, Blue (RGB) 622nm Red, 530nm Green, 470nm Blue LED Indication - Discrete 2.1V Red, 3V Green, 3V Blue 6-SMD, J-Lead"
D5 D6 D7 D8: "SURFACE MOUNT SCHOTTKY BARRIER DIODE"
D9: library part D_BAS40TW, "SURFACE MOUNT SCHOTTKY BARRIER DIODE ARRAYS"
D10: "Zener Diode 3.6V 150mW ∮5% Surface Mount 0503 (1308 Metric)"
D11: library part SML-P12UTT86, "Red 620nm LED Indication - Discrete 2V 2-SMD"
D12: "Diode Schottky 30V 100mA Surface Mount 0402/SOD-923F"
D13: "Diode Array 1 Pair Common Cathode Standard 75V 150mA Surface Mount SC-70, SOT-323"
J2: "Hirose BM20 Series, 0.4mm pitch, 2mm stack height, 12 pos, header"
J4 J5: "2 mm stack height, m2 standoff"
L1: library part CDRH2D18/LDNP-100NC, "10μH Shielded Inductor 1A 180 mOhm Max Nonstandard"
P1: "3.5 mm phone jack, 4 terminals"
P2 P3: "2.5 mm phone jack, 4 terminals"
P4 P5: "TC2030-MCP-NL"
Q1: "P-Channel 30-V (D-S) MOSFET"
Q2 Q4: "P-Channel 20 V (D-S) MOSFET"
Q3 Q5: "N-Channel 8 V (D-S) MOSFET"
Q6 Q7 Q8 Q9: "N-Channel 30 V (D-S) MOSFET"
Q10 Q11: "DUAL N-CHANNEL ENHANCEMENT MODE MOSFET"
Q12: "Dual P-Channel 12 V (D-S) MOSFET"
Q13 Q14 Q15: "Load Switch with Level-Shift"
R1 R20: library part CRCW0402910RFKED, "RES SMD 910 OHM 1% 1/16W 0402"
R2 R3 R12 R13 R34 R36: library part CRCW040247K0FKED, "RES SMD 47K OHM 1% 1/16W 0402"
R4 R14 R15 R30 R32 R37 R40 R42 R43 R48 R49 R50 R51 R52 R53: library part CRCW04021M00FKED, "RES SMD 1M OHM 1% 1/16W 0402"
R5 R11 R28 R31 R33: library part CRCW0402100KFKED, "RES SMD 100K OHM 1% 1/16W 0402"
R6 R26: library part CRCW0402110RFKED, "RES SMD 110 OHM 1% 1/16W 0402"
R7: library part CRCW0402220RFKED, "RES SMD 220 OHM 1% 1/16W 0402"
R8 R22: library part CRCW0402324RFKED, "RES SMD 324 OHM 1% 1/16W 0402"
R9 R10 R17 R19: library part CRCW040210K0FKED, "RES SMD 10K OHM 1% 1/16W 0402"
R16: library part RTAN0805BKE20R0, "RES SMD 20 OHM 0.1% 1/5W 0805"
R21: library part RT0402DRD0748K7L, "RES SMD 48.7K OHM 0.5% 1/16W 0402"
R23: library part RC0402FR-0724K3L, "RES SMD 24.3K OHM 0.5% 1/16W 0402"
R24: library part CRCW040220R0FKED, "RES SMD 20 OHM 1% 1/16W 0402"
R25: library part CRCW040212K1FKED, "RES SMD 12.1K OHM 1% 1/16W 0402"
R27: library part RC0402FR-075K76L, "RES SMD 5.76K OHM 0.5% 1/16W 0402"
R29: library part CRCW04022M00FKED, "RES SMD 2M OHM 1% 1/16W 0402"
R35: library part CRCW0402100RFKED, "RES SMD 100 OHM 1% 1/16W 0402"
R41 R45: library part CRCW04022K20FKED, "RES SMD 2.2K OHM 1% 1/16W 0402"
R46: library part CRCW040256K0FKED, "RES SMD 56K OHM 1% 1/16W 0402"
R47: library part CRCW0402470KJNED, "RES SMD 470K OHM 5% 1/16W 0402"
SW1 SW2 SW3: "ROTARY CODED SWITCHES"
SW4: "3.5 mm⊙2.9 mm Side-operational SMD  Light Touch Switches"
U1: library part LTC3200ES6-5#TRMPBF, "Low Noise, Regulated   Charge Pump DC/DC Converters"
U2: "Miniature Single-Cell, Fully Integrated Li-Ion,  Li-Polymer Charge Management Controllers"
U3: "Voltage Level Shifting GPIO  with LED Driver and Keypad Engine"
U4: "Piezoelectric Energy Harvesting Power Supply"
U5: "256-Kbit (32 K ⊙ 8) Serial (SPI) F-RAM"
U6: "1 pC Charge Injection, 100 pA Leakage  CMOS  5 V/5 V/3 V 4-Channel Multiplexer"
U7: "Micro-Power (50uA), Zero-Drift, Rail-to-Rail Out  Instrumentation Amplifier"
U8: "0.9 μA, High Precision Op Amps"
U9: "Rail-to-rail 0.9 V nanopower comparator"
U10: "A Powerful System-On-Chip for 2.4-GHz IEEE 802.15.4, 6LoWPAN  and ZigBee Applications"
U11 U13: "Ultralow Noise, 200 mA,  CMOS Linear Regulator"
U12: "Low Loss PowerPath Controller in ThinSOT"
Y1: "Real Time Clock Module with SPI-Bus"
Y2: "MHz Range Crystal Unit"

## Free pads (board coordinates)
  round 95 hole 70: ""(1950,1080) ""(2450,1080)
  round 70 hole 50: ""(2200,1080)

## Via types
v1: diameter 22, hole 8, Top Layer to Bottom Layer, 14 vias
v2: diameter 19.68, hole 8, Top Layer to Bottom Layer, 4 vias
v3: diameter 21.65, hole 8, Top Layer to Bottom Layer, 2 vias

## Nets (pads, with @x,y where several pads share a name; then routed paths per layer and width w, separated by ;. In a path a pad name is that pad's centre, name@x,y a point inside that pad or via, vN(x,y) a via of type N, cw(c..) or ccw(c..) an arc to the next point about the centre after c; other vN are vias at no path point)
BATTERYPACKDETECT: R5.2 U10.52
BATTERYPACKPOWER: C6.1 Q13.2 Q13.3 R5.1 R6.1 R7.1 R8.1 R9.1 R10.1 R11.1 U3.4 U3.12 U3.18
BLD_CTRL: P5.5 U10.18
BLD_RX: P5.4 U10.16
BLD_TX: P5.3 U10.17
CC2538_RF_N: B1.3 U10.38
CC2538_RF_P: B1.4 U10.37
CT1: D6.3 D8.3 pad.@1950,1080 U4.2
CT2: D5.3 D7.3 pad.@2450,1080 U4.1
CURRENT_WAVEFORM: U7.6 U10.19
CURRENTMEASUREEN: Q6.1 Q7.1 Q8.1 Q9.1 Q14.5 R52.1 U10.13
EXT_VOLT_SEL: P1.2 U10.49
EXT_VOLT_WAVE: P1.3 U10.21
G1: Q12.5 U12.5
G2: Q12.2 R47.2 U12.4
GND: B1.2 B1.5 B1.6 C2.1 C3.1 C4.2 C5.2 C6.2 C9.2 C10.2 C11.2 C12.2 C13.2 C15.2 C16.2 C17.2 C18.2 C19.2 C20.2 C21.2 C22.2 C23.2 C24.2 C25.2 C26.2 C27.2 C28.2 C29.2 C30.2 C31.2 C32.2 C33.2 C34.2 C35.2 C36.2 C37.2 C38.2 C39.2 C40.2 C43.2 C44.2 C45.2 C46.2 C47.2 C48.2 C49.2 C50.2 D10.1 P1.1 P2.1 P3.1 P4.5 P5.2 Q6.2 Q7.2 Q8.2 Q9.2 Q10.1 Q10.4 Q11.1 Q13.1 Q14.1 Q15.1 R2.2 R3.2 R4.2 R32.2 R33.2 R43.2 R46.2 R49.2 R52.2 R53.2 SW1.C SW2.C SW3.C SW4.2 U1.2 U2.2 U3.3 U3.10 U3.17 U3.26 U3.29 U4.9 U4.11 U5.4 U6.3 U6.13 U7.4 U8.4 U9.2 U10.1 U10.57 U11.3 U11.7 U12.2 U12.3 U13.3 U13.7 Y1.6 Y2.2 Y2.4
  other v1: 2605,1165 1328.54,1394.53 1408.54,1394.53 1488.54,1394.53 1368.54,1434.53 1448.54,1434.53 1328.54,1474.53 1408.54,1474.53 1488.54,1474.53 1368.54,1514.53 1448.54,1514.53 1328.54,1554.53 1408.54,1554.53 1488.54,1554.53
  other v2: 5343.35,5147.72 5386.65,5147.72 5343.35,5191.02 5386.65,5191.02
  other v3: 3425,2070 3610,3350
I2C_SCL: R10.2 U3.25 U10.53
I2C_SDA: R9.2 U3.24 U10.54
IN+: D5.1 Q4.3 R16.1 U7.3
IN-: D6.1 Q2.3 R16.2 U7.2
LDO_EN: D13.3 U11.4
NetANT1_1: ANT1.1 B1.1
NetC1_1: C1.1 U1.4
NetC1_2: C1.2 U1.6
NetC3_2: C3.2 C4.1 D2.1 U1.1 U2.4
NetC7_1: C7.1 C8.1 D7.1 Q5.2
NetC7_2: C7.2 C8.2 D8.1 Q3.2
NetC14_2: C14.2 U4.3
NetC16_1: C16.1 U4.7 U4.8
NetC19_1: C19.1 R19.2 Y1.9
NetC27_1: C27.1 R35.2
NetC28_1: C28.1 C30.1 U10.32 U10.56
NetC37_1: C37.1 U10.34 Y2.1
NetC38_1: C38.1 U10.35 Y2.3
NetC43_1: C43.1 R45.1 U10.28
NetD2_2: D2.2 R1.1
NetD4_1: D4.1 U3.28
NetD4_2: D4.2 U3.1
NetD4_3: D4.3 U3.2
NetD4_4: D4.4 R8.2
NetD4_5: D4.5 R7.2
NetD4_6: D4.6 R6.2
NetD5_2: D5.2 Q4.2 R12.1
NetD6_2: D6.2 Q2.2 R13.1
NetD7_2: D7.2 Q5.3 R14.1
NetD8_2: D8.2 Q3.3 R15.1
NetD9_1: D9.1 Q4.1 Q7.3
NetD9_3: D9.3 Q2.1 Q8.3
NetD9_4: D9.4 R13.2
NetD9_6: D9.6 R12.2
NetD11_1: D11.1 R41.1
NetL1_2: L1.2 U4.5
NetQ3_1: Q3.1 Q6.3 R15.2
NetQ5_1: Q5.1 Q9.3 R14.2
NetQ10_6: Q10.6 R42.2 U10.31
NetQ11_2: Q11.2 U10.22
NetQ13_5: Q13.5 R49.1 U10.6
NetQ13_6: Q13.6 R48.2
NetQ14_6: Q14.6 R50.2
NetQ15_6: Q15.6 R51.2
NetR1_2: R1.2 U2.1
NetR2_1: R2.1 U2.5
NetR4_1: R4.1 U1.3 U10.27
NetR11_2: R11.2 U3.23
NetR17_1: R17.1 Y1.1
NetR20_2: R20.2 R21.1
NetR21_2: R21.2 U6.4
NetR22_2: R22.2 R23.1
NetR23_2: R23.2 U6.5
NetR24_2: R24.2 R25.1
NetR25_2: R25.2 U6.11
NetR26_2: R26.2 R27.1
NetR27_2: R27.2 U6.10
NetR28_2: R28.2 R29.1 R33.1 U9.3
NetR34_1: R34.1 R35.1 U8.6
NetR40_2: R40.2 SW4.1 U10.9
NetR46_1: R46.1 U10.42
NetSW1_1: SW1.1 U3.5
NetSW1_2: SW1.2 U3.6
NetSW1_4: SW1.4 U3.7
NetSW1_8: SW1.8 U3.8
NetSW2_1: SW2.1 U3.13
NetSW2_2: SW2.2 U3.14
NetSW2_4: SW2.4 U3.15
NetSW2_8: SW2.8 U3.16
NetSW3_1: SW3.1 U3.19
NetSW3_2: SW3.2 U3.20
NetSW3_4: SW3.4 U3.21
NetSW3_8: SW3.8 U3.22
NetU5_1: U5.1 U10.26
NetU10_11: U10.11 U13.4
PD3: D11.2 U10.29
PGOOD: D13.2 U4.10
R\D\Y\_\I\N\: D12.2 P2.2 P3.2 Q10.5
R\E\A\D\Y\: D12.1 Q11.6 R36.2
R\E\S\E\T\: P4.3 P5.6 R45.2
RG1: C23.1 R20.1 R22.1 R24.1 R26.1 U7.1
RG2: U6.6 U7.8
RTC_CLKOUT: U10.44 Y1.3
RTC_CS: U10.30 Y1.8
SPI_CLK: U5.6 U10.51 Y1.4
SPI_MISO: U5.2 U10.5 Y1.5
SPI_MOSI: U5.5 U10.50 Y1.10
SW_A0: U6.1 U10.7
SW_A1: U6.14 U10.8
SW_EN: U6.2 U10.25
TCK: P4.4 U10.47
TDO: P4.6 Q10.3 R37.2 U10.48
TMS: P4.2 U10.46
V_BATT: C5.1 P1.4 Q1.2 U2.3
V_EXTERNAL: C44.1 D3.2 D13.1 Q1.3 Q12.6
V_HARVEST: C2.2 C15.1 C47.1 D1.2 L1.1 Q12.3 U1.5 U4.6 U12.1
V_PROG: D1.1 D3.1 D10.2 P4.1 P5.1 Q1.1 R3.1 R19.1
V_SELECTED: C45.1 C48.1 C50.1 Q12.1 Q12.4 R47.1 U11.6 U12.6 U13.6
VCAP: C9.1 C10.1 C11.1 C12.1 C13.1 C14.1 P2.3 P3.3 R36.1 U4.4
VCAP_LOOPBACK: P2.4 P3.4 Q10.2 R43.1
VCC_GATED1: C24.1 C25.1 C26.1 Q15.2 Q15.3 R28.1 R30.1 U8.8 U9.5
VCC_GATED2: C20.1 C21.1 C22.1 Q14.2 Q14.3 U6.12 U7.7
VCC_MCU: C17.1 C18.1 C29.1 C31.1 C32.1 C33.1 C34.1 C35.1 C36.1 C39.1 C40.1 C46.1 Q13.4 R17.2 R37.1 R40.1 R41.2 R42.1 R48.1 U5.3 U5.7 U5.8 U10.10 U10.15 U10.24 U10.33 U10.36 U10.39 U10.40 U10.41 U10.43 U10.55 U11.1 Y1.2
VCC_SENSE: C49.1 Q14.4 Q15.4 R50.1 R51.1 U10.23 U13.1
VOLTAGE_WAVEFORM: R34.2 U8.7 U9.4
VOLTAGEMEASUREEN: Q15.5 R53.1 U10.14
VOLTAGESENSEIN: pad.@2200,1080 R31.2 U8.5
VOLTAGETRIGGER: R29.2 U9.1 U10.12
VREF: R30.2 R32.1 U8.3
VREF_BUF: R31.1 U7.5 U8.1 U8.2 U10.20
pads on no net: ANT1. D9.2 D9.5 J2. J2.1 J2.2 J2.3 J2.4 J2.5 J2.6 J2.7 J2.8 J2.9 J2.10 J2.11 J2.12 J4. J5. P1. P2. P3. P4. P5. Q11.3 Q11.4 Q11.5 SW4. U3.9 U3.11 U3.27 U5.9 U6.7 U6.8 U6.9 U10.2 U10.3 U10.4 U10.45 U11.2 U11.5 U13.2 U13.5 Y1.7

## Keep-outs
Keep-Out Layer:
  the board outline again, w10

## Silkscreen, mask and mechanical layers (free items; w line width, h text height)
Top Overlay:
  lines w10: 1545,5300 3050,5300 3050,5675 3995,5675 3995,6050 1545,6050 1545,5300

## Text inside footprints (layer, text, board x,y; h text height)
C19: Top Overlay "+" at 1825.51,2830.67 h48
SW1: Top Overlay "0" at 5703.19,5487.05 h30; Top Overlay "8" at 5722.87,5321.69 h30 r180
SW2: Top Overlay "0" at 4250.24,5337.05 h30; Top Overlay "5" at 4269.92,5171.69 h30 r180
SW3: Top Overlay "0" at 4833.19,5392.05 h30; Top Overlay "5" at 4852.87,5226.69 h30 r180